# Altium PCB PCB1.PcbDoc
Units mm, origin at the board's own origin, x right, y up, seen from the top; angles counter-clockwise.
Board outline 152.4 x 101.6 mm, 4 copper layers (Top Layer, Layer 1, Layer 2, Bottom Layer), stack 0.603 mm thick; 62 components, 20 nets, 124 pads, 28 vias.
Unrouted connection lines stored in the file: 12.
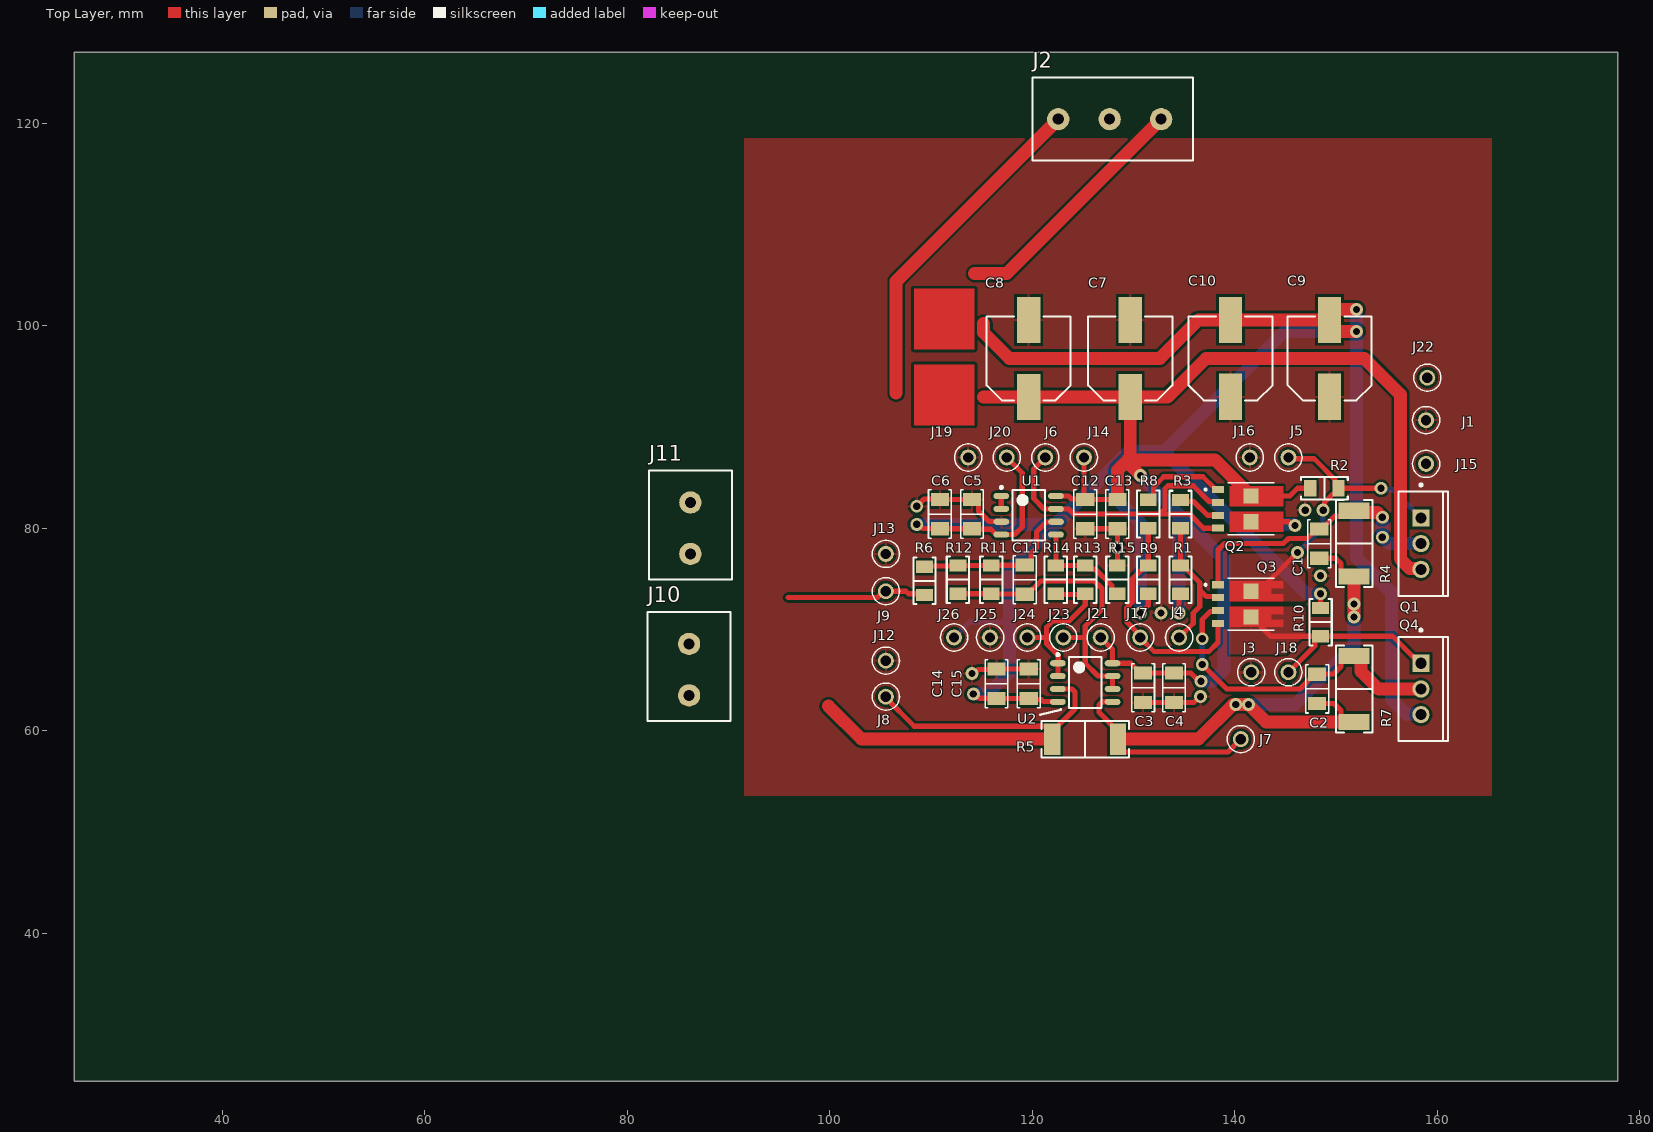
[diagram p0: Top Layer view]
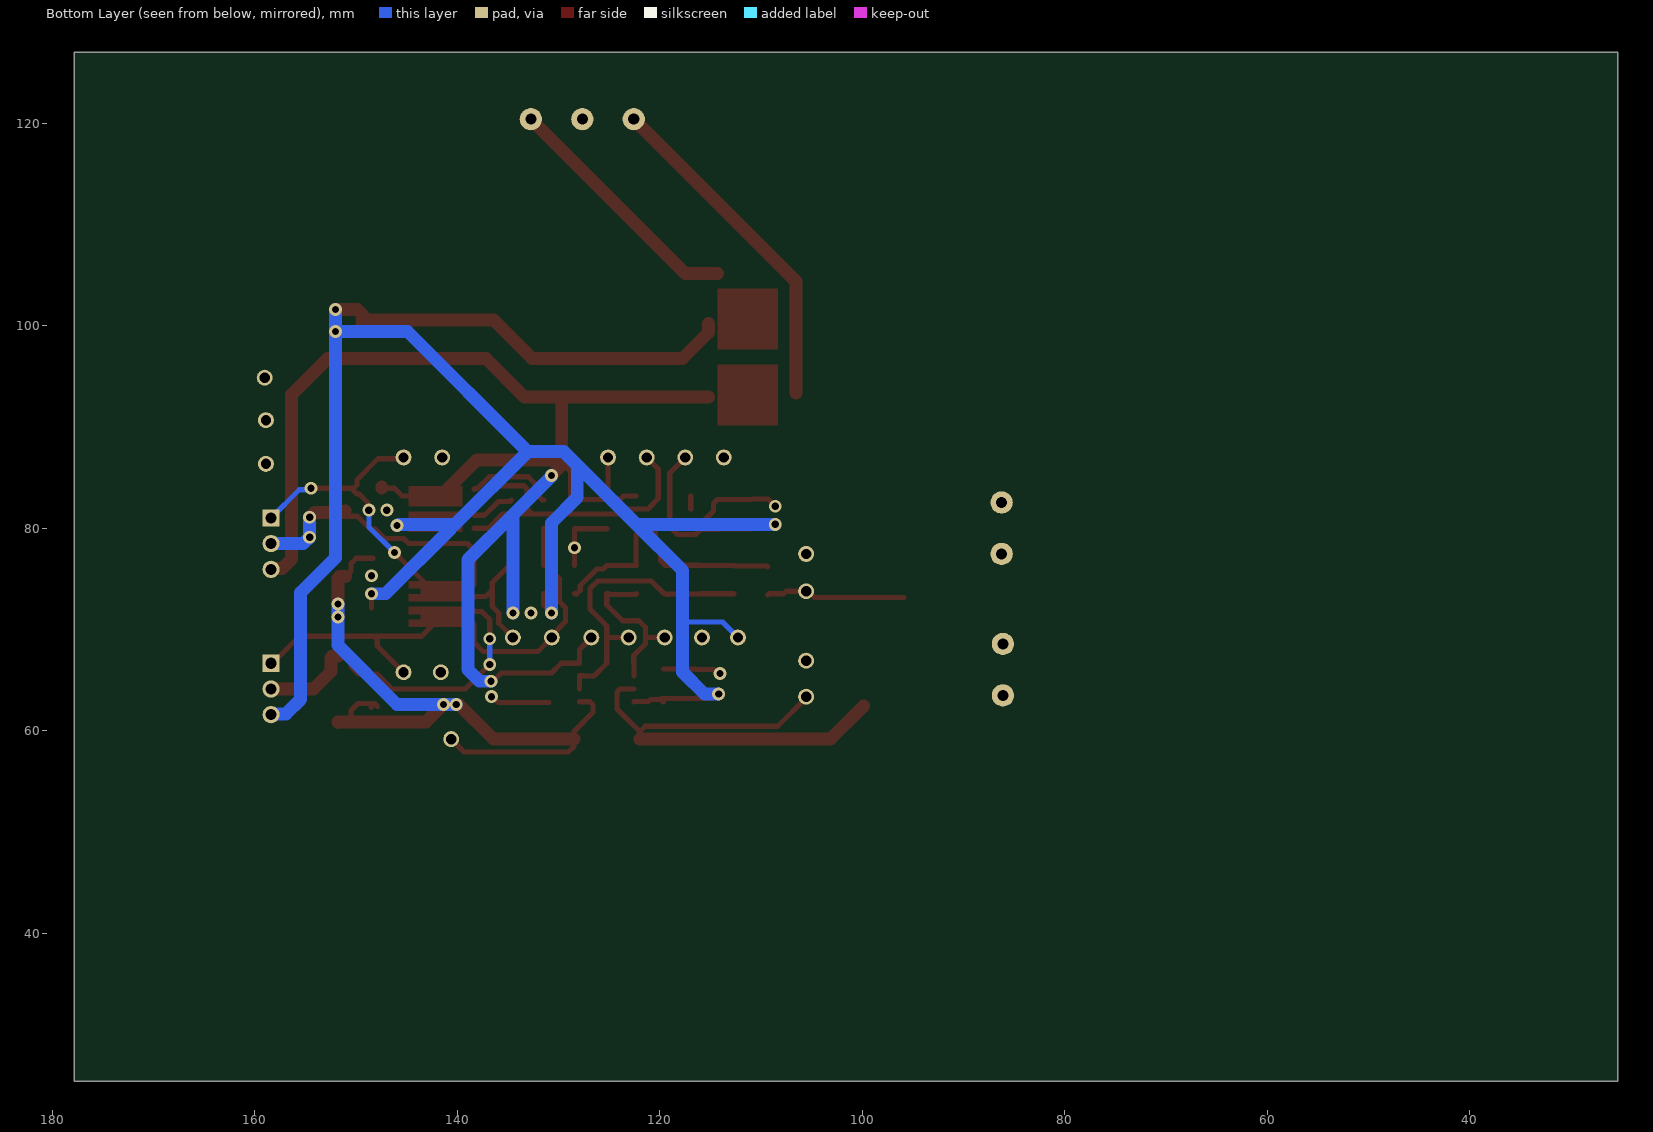
[diagram p1: Bottom Layer view, seen from below]
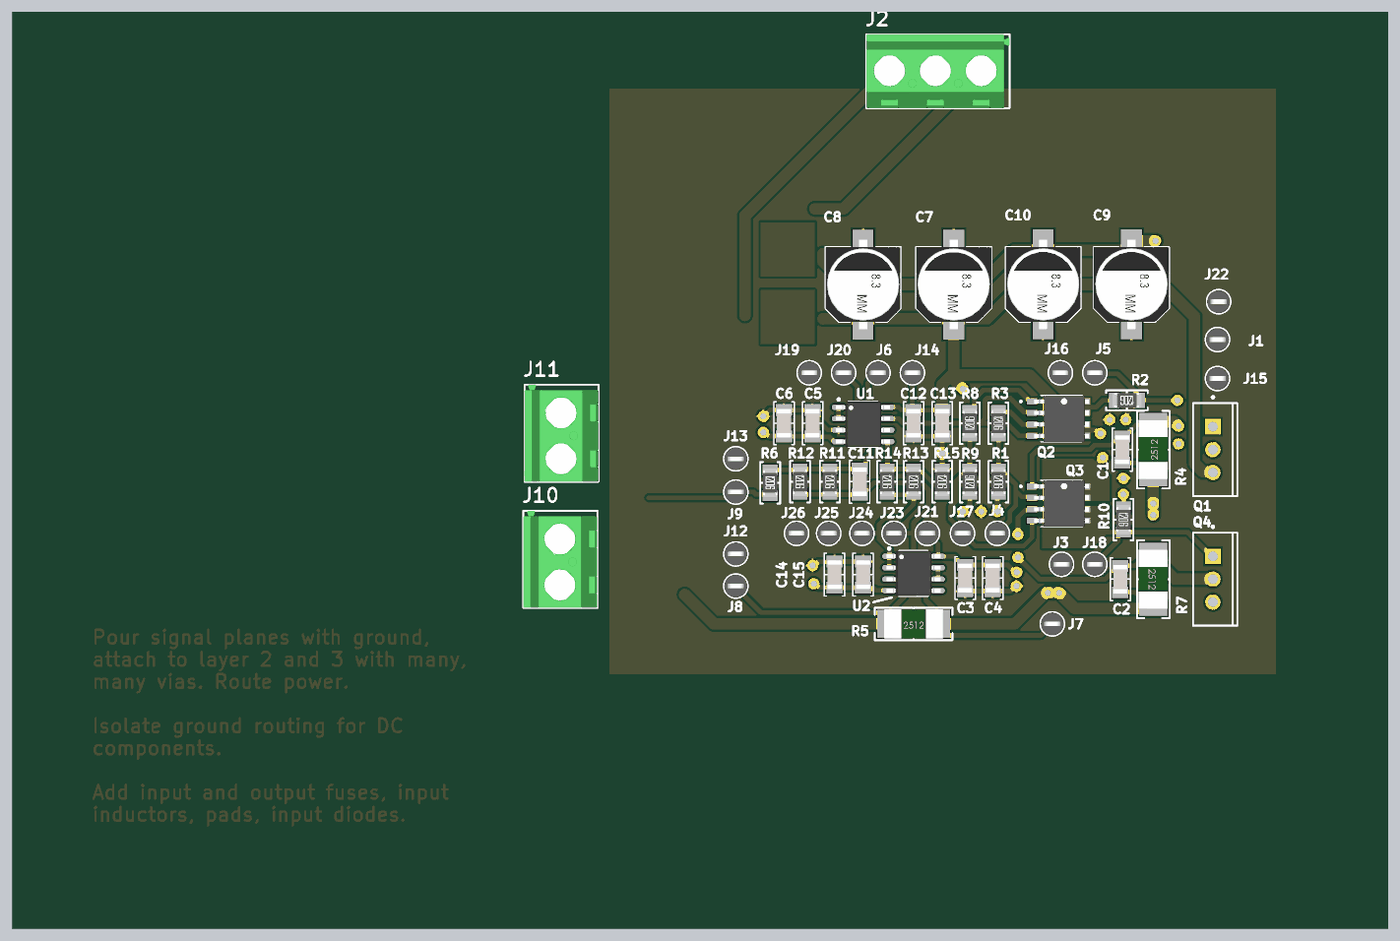
[diagram p2: 3D render of the assembled board from above, using the file's embedded part models]

## Layer stack, top to bottom
Top Solder: solder mask 0.0102, Solder Resist, Dk 3.5
Top Layer: signal copper 0.0356
Dielectric 2: prepreg 0.0711, PP-006, Dk 4.1
Layer 1: signal copper 0.035
Dielectric 1: dielectric 0.32, FR-4, Dk 4.8
Layer 2: signal copper 0.035
Dielectric 3: prepreg 0.0711, PP-006, Dk 4.1
Bottom Layer: signal copper 0.0356
Bottom Solder: solder mask 0.0102, Solder Resist, Dk 3.5

## Board outline
25.4,25.4 177.8,25.4 177.8,127 25.4,127

## Design rules (kind name [scope] priority, off if disabled: settings)
Clearance [All] p1: gap=0.254 ignorepadtopadclearanceinfootprint=FALSE except(0: Arc-Hole Track-Hole SMDPad-Hole THPad-Hole Via-Hole Fill-Hole Poly-Hole Region-Hole Text-Hole)
PolygonConnect [All] p1: connectstyle=Relief reliefconductorwidth=0.254 reliefentries=4 polygonreliefangle="90 Angle" airgapwidth=0.254
RoutingVias [All] p1: holewidth=0.711 width=1.27 viastyle="Through Hole" minholewidth=0.711 minwidth=1.27 maxholewidth=0.711 maxwidth=1.27
SolderMaskExpansion [All] p1: expansion=0.102 istentingtop=FALSE
Width [All] p1: maxlimit=1.27 minlimit=0.254 preferedwidth=0.508 midlayer1_maxwidth=0.254 midlayer1_prefwidth=0.254 midlayer2_maxwidth=0.254 midlayer2_prefwidth=0.254 minimp=50.000000 maximp=50.000000 favimp=50.000000
30 further rules are at their usual default settings.

## Components (designator, comment, footprint, x,y, rotation, side; value= is the part's Value field where it differs from the comment)
C1 "0.1 µF" "CAP 1206_3216 - 0.8MM" 148.336,78.486 r90 top
C2 "0.1 µF" "CAP 1206_3216 - 0.8MM" 148.119,64.135 r270 top
C3 "1 µF" "CAP 1206_3216 - 0.8MM" 130.937,64.262 r90 top
C4 "0.1 µF" "CAP 1206_3216 - 0.8MM" 133.985,64.262 r90 top
C5 "0.1 µF" "CAP 1206_3216 - 0.8MM" 114.046,81.407 r90 top
C6 "1 µF" "CAP 1206_3216 - 0.8MM" 110.871,81.407 r90 top
C7 "100 µF" "CAP ALSMD 8.3MM H10.5MM" 129.667,96.774 r90 top
C8 "100 µF" "CAP ALSMD 8.3MM H10.5MM" 119.634,96.774 r90 top
C9 "100 µF" "CAP ALSMD 8.3MM H10.5MM" 149.352,96.784 r90 top
C10 "100 µF" "CAP ALSMD 8.3MM H10.5MM" 139.573,96.784 r90 top
C11 "47pF" "CAP 1206_3216 - 1.8MM" 119.253,74.93 r270 top
C12 "1 µF" "CAP 1206_3216 - 0.8MM" 125.222,81.407 r90 top
C13 "0.1 µF" "CAP 1206_3216 - 0.8MM" 128.397,81.407 r90 top
C14 "0.1 µF" "CAP 1206_3216 - 0.8MM" 116.459,64.643 r90 top
C15 "1 µF" "CAP 1206_3216 - 0.8MM" 119.634,64.643 r90 top
J1 "5001" FP-5001-MFG 158.877,90.678 r0 top
J2 "282837-3" "TE 282837-3" 127.635,120.396 r0 top
J3 "5001" FP-5001-MFG 141.605,65.786 r0 top
J4 "5001" FP-5001-MFG 134.493,69.215 r0 top
J5 "5001" FP-5001-MFG 145.288,86.995 r0 top
J6 "5001" FP-5001-MFG 121.285,86.995 r0 top
J7 "5001" FP-5001-MFG 140.589,59.182 r0 top
J8 "5001" FP-5001-MFG 105.537,63.373 r0 top
J9 "5001" FP-5001-MFG 105.537,73.787 r0 top
J10 "282837-2" "TE 282837-2" 86.106,66.04 r90 top
J11 "282837-2" "TE 282837-2" 86.233,80.01 r90 top
J12 "5001" FP-5001-MFG 105.537,66.929 r0 top
J13 "5001" FP-5001-MFG 105.537,77.47 r0 top
J14 "5001" FP-5001-MFG 125.095,86.995 r0 top
J15 "5001" FP-5001-MFG 158.877,86.36 r0 top
J16 "5001" FP-5001-MFG 141.478,86.995 r0 top
J17 "5001" FP-5001-MFG 130.644,69.215 r0 top
J18 "5001" FP-5001-MFG 145.288,65.786 r0 top
J19 "5001" FP-5001-MFG 113.665,86.995 r0 top
J20 "5001" FP-5001-MFG 117.475,86.995 r0 top
J21 "5001" FP-5001-MFG 126.746,69.215 r0 top
J22 "5001" FP-5001-MFG 159.004,94.869 r0 top
J23 "5001" FP-5001-MFG 123.063,69.215 r0 top
J24 "5001" FP-5001-MFG 119.507,69.215 r0 top
J25 "5001" FP-5001-MFG 115.824,69.215 r0 top
J26 "5001" FP-5001-MFG 112.268,69.215 r0 top
Q1 "TIP32C" ONSC-TO-220-3-221A-09 158.369,78.486 r0 top
Q2 "PHPT610030NPK" TRANS_BUK9K18-40E,115 141.605,81.915 r0 top
Q3 "PHPT610030NPK" TRANS_BUK9K18-40E,115 141.605,72.517 r0 top
Q4 "TIP31C" ONSC-TO-220-3-221A-09 158.369,64.135 r0 top
R1 "2.2 kOhms" "RES 1206_3216" 134.62,74.93 r270 top
R2 "51 Ohms" "RES 1206_3216" 148.844,83.947 r180 top
R3 "5.1 Ohms" "RES 1206_3216" 134.62,81.407 r270 top
R4 "330 mOhms" "STACKPOLE CSR2512" 151.765,78.486 r90 top
R5 "500 mOhms" "STACKPOLE CSR2512" 125.222,59.182 r0 top
R6 "6.2 kOhms" "RES 1206_3216" 109.347,74.803 r270 top
R7 "330 mOhms" "STACKPOLE CSR2512" 151.765,64.135 r270 top
R8 "5.1 Ohms" "RES 1206_3216" 131.445,81.41 r90 top
R9 "2.2 kOhms" "RES 1206_3216" 131.445,74.93 r90 top
R10 "51 Ohms" "RES 1206_3216" 148.463,70.739 r270 top
R11 "1 kOhms" "RES 1206_3216" 115.951,74.93 r270 top
R12 "1 kOhms" "RES 1206_3216" 112.649,74.93 r270 top
R13 "1 kOhms" "RES 1206_3216" 125.222,74.93 r270 top
R14 "1 kOhms" "RES 1206_3216" 122.301,74.93 r270 top
R15 "6.2 kOhms" "RES 1206_3216" 128.397,74.93 r270 top
U1 "TLV9362" SOIC8-127P600X175-8N 119.634,81.28 r0 top
U2 "TLV9362" SOIC8-127P600X175-8N 125.222,64.77 r0 top

## Footprints (in the part's own frame and the unit in brackets; to place one, negate y for a bottom-side part, rotate by r counter-clockwise, add the part's x,y. Pads: shape width x height; smd on the part's side, far side on the other; paste and mask are expansions set on the pad)
"CAP 1206_3216 - 0.8MM" [mm] "Chip Capacitor, 2-Leads, Body 3.25x1.60mm, IPC Medium Density"
  rect 1.3x1.8 smd: 1(-1.45,0) 2(1.45,0)
  silkscreen extent -2.38,-1.13 2.38,1.13, body extent -1.6,-0.8 1.6,0.8, height 0.8
"CAP 1206_3216 - 1.8MM" [mm] "Chip Capacitor, 2-Leads, Body 3.25x1.60mm, IPC Medium Density"
  rect 1.3x1.8 smd: 1(-1.45,0) 2(1.45,0)
  silkscreen extent -2.38,-1.13 2.38,1.13, body extent -1.6,-0.8 1.6,0.8, height 1.8
"CAP ALSMD 8.3MM H10.5MM" [mm] "Aluminum Electrolytic Capacitor, Body 8.30x8.30x10.50mm, IPC Low Density"
  rect 4.55x2.3 smd: 1(-3.8,0) 2(3.8,0)
  silkscreen extent -4.15,-4.15 4.15,4.15, body extent -4.95,-4.15 4.95,4.15, height 10.5
FP-5001-MFG [mm]
  round 1.57 hole 1.016 paste-2539.97 mask+0: 1(0,0)
  silkscreen extent -1.35,-1.34 1.35,1.34, body extent -1.45,-1.45 1.45,1.45, height 0.25
ONSC-TO-220-3-221A-09 [mm] "FM, 3-Leads, Body 10.3x4.85mm, Pitch 2.54mm"
  rect 1.7x1.7 hole 1.1: 1(0,2.54)
  round 1.7 hole 1.1: 2(0,0) 3(0,-2.54)
  silkscreen extent -2.2,-5.15 2.69,5.92, body extent -2.18,-5.15 2.67,5.15, height 19.85
"RES 1206_3216" [mm] "Chip Resistor, 2-Leads, Body 3.13x1.55mm, IPC Medium Density"
  rect 1.2x1.65 smd: 1(-1.4,0) 2(1.4,0)
  silkscreen extent -2.3,-1.1 2.3,1.1, body extent -1.6,-0.8 1.6,0.8, height 0.6
SOIC8-127P600X175-8N [mm] "SOIC, 8-Leads, Body 4.91x3.90mm, Pitch 1.27mm, IPC Medium Density"
  oval 1.55x0.6 smd: 1(-2.7,1.905) 2(-2.7,0.635) 3(-2.7,-0.635) 4(-2.7,-1.905) 5(2.7,-1.905) 6(2.7,-0.635) 7(2.7,0.635) 8(2.7,1.905)
  silkscreen extent -2.82,-2.5 1.6,2.88, body extent -3,-2.5 3,2.5, height 1.75
"STACKPOLE CSR2512" [mm] "Chip Resistor, 2-Leads, Body 6.40x3.20mm, IPC Medium Density"
  rect 1.6x3.1 smd: 1(-3.25,0) 2(3.25,0)
  silkscreen extent -4.3,-1.8 4.3,1.8, body extent -3.27,-1.6 3.28,1.6, height 0.5
"TE 282837-2" [mm] "Wire to Board Terminal Block Horizontal with Board, 2 Postions, Body 10.76x8.2 mm, Pitch 5.08mm"
  round 2.2 hole 1.1: 1(-2.54,0) 2(2.54,0)
  silkscreen extent -5.08,-4.1 5.68,4.1, body extent -5.08,-4.1 5.68,4.1, height 10.3
"TE 282837-3" [mm] "Wire to Board Terminal Block Horizontal with Board, 3 Postions, Body 15.84x8.2mm, Pitch 5.08mm"
  round 2.2 hole 1.1: 1(-5.08,0) 2(0,0) 3(5.08,0)
  silkscreen extent -7.62,-4.1 8.22,4.1, body extent -7.62,-4.1 8.22,4.1, height 10.3
TRANS_BUK9K18-40E,115 [mm]
  rect 1.15x0.7 smd paste-0.025: 1(-3.275,1.905) 2(-3.275,0.635) 3(-3.275,-0.635) 4(-3.275,-1.905)
  rect 1.5x1.5 smd paste-2 mask+0: 5_6(0,-1.27) 7_8(0,1.27)
  Top Layer region: 3.175,-0.985 2,-0.985 2,-1.555 3.175,-1.555 3.175,-2.255 -2.1,-2.255 -2.1,-0.285 3.175,-0.285
  Top Layer region: 3.175,1.555 2,1.555 2,0.985 3.175,0.985 3.175,0.285 -2.1,0.285 -2.1,2.255 3.175,2.255
  silkscreen extent -4.6,-2.57 2.29,2.57, body extent -3.03,-2.56 3.03,2.56, height 1.05

## Part data
C1 C2 C4 C5 C13 C14: library part 885012208087, "CAP CER 0.1UF 50V X7R 1206", Device Package="1206 (3216 Metric)", manufacturer="Würth Elektronik", Operating Temperature="-55°C ~ 125°C", Supplier Part Number 1=732-8127-1-ND, Temperature Coefficient=X7R, Tolerance=±10%, Voltage - Rated=50V, Applications="General Purpose", Capacitance="0.1 µF", componentlink1description=Datasheet, componentlink1url=https://katalog.we-online.de/pbs/datasheet/885012208087.pdf, componentlink2description="DigiKey Link", componentlink2url=https://www.digikey.com/en/products/detail/würth-elektronik/885012208087/5453982, lastupdated="6/4/2024 7:10:27 PM", Lifecycle Status=Active, Minimum Order=1, Mounting Type="Surface Mount, MLCC", Package / Case="1206 (3216 Metric)", packaging=TapeAndReel, Part Number=885012208087, Part Status=Active, partid=20879, price=0.06, series=WCAP-CSGP, Size / Dimension="0.126\" L x 0.063\" W (3.20mm x 1.60mm)", Supplier 1=DigiKey, Thickness (Max)="0.035\" (0.90mm)"
C3 C6 C12 C15: library part 885012208093, "CAP CER 1UF 50V X7R 1206", Device Package="1206 (3216 Metric)", manufacturer="Würth Elektronik", Operating Temperature="-55°C ~ 125°C", Supplier Part Number 1=732-7577-1-ND, Temperature Coefficient=X7R, Tolerance=±10%, Voltage - Rated=50V, Applications="General Purpose", Capacitance="1 µF", componentlink1description=Datasheet, componentlink1url=https://katalog.we-online.de/pbs/datasheet/885012208093.pdf, componentlink2description="DigiKey Link", componentlink2url=https://www.digikey.com/en/products/detail/würth-elektronik/885012208093/5453432, lastupdated="6/4/2024 7:10:33 PM", Lifecycle Status=Active, Minimum Order=1, Mounting Type="Surface Mount, MLCC", Package / Case="1206 (3216 Metric)", packaging=TapeAndReel, Part Number=885012208093, Part Status=Active, partid=39665, price=0.10, series=WCAP-CSGP, Size / Dimension="0.126\" L x 0.063\" W (3.20mm x 1.60mm)", Supplier 1=DigiKey, Thickness (Max)="0.075\" (1.90mm)"
C7 C8 C9 C10: library part 50TZV100M8X10.5, "CAP ALUM 100UF 20% 50V SMD", Device Package="Radial, Can - SMD", Lifetime @ Temp.="2000 Hrs @ 105°C", manufacturer=Rubycon, Operating Temperature="-55°C ~ 105°C", Ratings=AEC-Q200, Ripple Current @ High Frequency="350 mA @ 100 kHz", Ripple Current @ Low Frequency="175 mA @ 120 Hz", Supplier Part Number 1=1189-1651-1-ND, Tolerance=±20%, Voltage - Rated="50 V", Applications=Automotive, Capacitance="100 µF", componentlink1description=Datasheet, componentlink1url=http://www.rubycon.co.jp/en/catalog/e_pdfs/aluminum/e_tzv.pdf, componentlink2description="DigiKey Link", componentlink2url=https://www.digikey.com/en/products/detail/rubycon/50TZV100M8X10-5/3134931, Height - Seated (Max)="0.413\" (10.50mm)", Impedance="340 mOhms", lastupdated="6/3/2024 8:15:48 PM", Lifecycle Status=Active, Minimum Order=1, Mounting Type="Surface Mount", Package / Case="Radial, Can - SMD", packaging=TapeAndReel, Part Number=50TZV100M8X10.5, Part Status=Active, partid=7533, Polarization=Polar, price=0.16, series=TZV, Size / Dimension="0.315\" Dia (8.00mm)", Supplier 1=DigiKey, Surface Mount Land Size="0.327\" L x 0.327\" W (8.30mm x 8.30mm)"
C11: library part 1206AA470KAT1A, "CAP CER 47PF 1KV C0G/NP0 1206", Device Package="1206 (3216 Metric)", manufacturer="AVX Corporation", Operating Temperature="-55°C ~ 125°C", Supplier Part Number 1=478-2949-1-ND, Temperature Coefficient="C0G, NP0", Tolerance=±10%, Voltage - Rated="1000V (1kV)", Applications="General Purpose", Capacitance=47pF, componentlink1description=Datasheet, componentlink1url=http://datasheets.avx.com/AVX-HV_MLCC.pdf, componentlink2description="DigiKey Link", componentlink2url=http://digikey.com/product-detail/en/avx-corporation/1206AA470KAT1A/478-2949-1-ND/808148, Features="High Voltage", lastupdated="9/2/2020 1:05:31 AM", Lifecycle Status=Active, Minimum Order=1, Mounting Type="Surface Mount, MLCC", Package / Case="1206 (3216 Metric)", packaging=TapeAndReel, Part Number=1206AA470KAT1A, Part Status=Active, partid=21825, price=0.11, series=-, Size / Dimension="0.130\" L x 0.063\" W (3.30mm x 1.60mm)", Supplier 1=DigiKey, Thickness (Max)="0.071\" (1.80mm)"
J1 J3 J4 J5 J6 J7 J8 J9 J12 J13 J14 J15 J16 J17 J18 J19 J20 J21 J22 J23 J24 J25 J26: library part CMP-2000-05181-2, "PC TEST POINT MINIATURE BLACK", Color=Black, Flammability Rating="UL94 V-0", Package Quantity=100, Body Material=Bronze, Contact Material=Bronze, Contact Plating=Silver, Diameter=2.54mm, Height=0.3inch, Hole Diameter=1.6mm, Housing Color=Black, Inside Diameter=1.27mm, Insulation=Insulated, Insulation Material=Nylon, Lead Free="Lead Free", Length=7.62mm, Material=Nylon, Mount="Through Hole", Number of Contacts=1, Number of Ports=1, Orientation=Straight, Outside Diameter=2.54mm, packaging=Bulk, Plating=Silver, REACH SVHC="No SVHC", RoHS Compliant=Yes, series=THM, Termination="Through Hole"
J2: "TERM BLK 3P SIDE ENT 5.08MM PCB", Color=Green, Current="13.5 A", manufacturer="TE Connectivity AMP Connectors", Supplier Part Number 1=A113321-ND, Voltage="300 V", componentlink1description=Datasheet, componentlink1url=https://www.te.com/commerce/DocumentDelivery/DDEController?Action=srchrtrv&DocNm=282837&DocType=Customer+Drawing&DocLang=English, componentlink2description="DigiKey Link", componentlink2url=https://www.digikey.com/en/products/detail/te-connectivity-amp-connectors/282837-3/2187974, Features="Interlocking (Side)", lastupdated="6/21/2022 3:00:39 PM", Lifecycle Status=Active, Mating Orientation="Horizontal with Board", Minimum Order=1, Mounting Type="Through Hole", Number of Levels=1, packaging=Tray, Part Number=282837-3, Part Status=Active, Pitch="0.200\" (5.08mm)", Positions Per Level=3, price=0.47, series=Buchanan, Supplier 1=DigiKey, Wire Gauge="16-28 AWG", Wire Termination="Screw - Rising Cage Clamp"
J10 J11: "TERM BLK 2P SIDE ENT 5.08MM PCB", Color=Green, Current="13.5 A", manufacturer="TE Connectivity AMP Connectors", Supplier Part Number 1=A113320-ND, Voltage="300 V", componentlink1description=Datasheet, componentlink1url=https://www.te.com/commerce/DocumentDelivery/DDEController?Action=srchrtrv&DocNm=282837&DocType=Customer+Drawing&DocLang=English, componentlink2description="DigiKey Link", componentlink2url=https://www.digikey.com/en/products/detail/te-connectivity-amp-connectors/282837-2/2187973, Features="Interlocking (Side)", lastupdated="6/21/2022 3:00:23 PM", Lifecycle Status=Active, Mating Orientation="Horizontal with Board", Minimum Order=1, Mounting Type="Through Hole", Number of Levels=1, packaging=Tray, Part Number=282837-2, Part Status=Active, Pitch="0.200\" (5.08mm)", Positions Per Level=2, price=0.31, series=Buchanan, Supplier 1=DigiKey, Wire Gauge="16-28 AWG", Wire Termination="Screw - Rising Cage Clamp"
Q1: "Complementary Silicon Plastic Power Transistor, 3-Pin TO-220, Tube", manufacturer=STMicroelectronics, Supplier Part Number 1=TIP32COS-ND, componentlink1description="Manufacturer URL", componentlink1url=https://www.st.com/content/st_com/en.html, componentlink2description=Datasheet, componentlink2url=https://eu.mouser.com/datasheet/2/389/tip32c-1852151.pdf, ComponentLink3Description="Package Specification", ComponentLink3URL=http://www.onsemi.com/pub_link/Collateral/221A-09.PDF, DatasheetVersion="Rev. 14", fT Min (MHz)=3, IC Continuous (A)=3, Mounting Technology="Through Hole", PackageDescription="3-Pin Flange Mount, Vertical Straight Lead, Body 9.97 x 4.445 mm, Pitch 2.54 mm", PackageReference=TO-220-3-221A-09, PackageVersion="Rev. AG, 09/2011", Packing=Tube, PartNumber=TIP32C, Polarity=PNP, RoHS=FALSE, Supplier 1=Digi-Key
Q4: "Complementary Silicon Plastic Power Transistor, 3-Pin TO-220, Tube", manufacturer=STMicroelectronics, Supplier Part Number 1=TIP31COS-ND, componentlink1description="Manufacturer URL", componentlink1url=https://www.st.com/content/st_com/en.html, componentlink2description=Datasheet, componentlink2url=https://eu.mouser.com/datasheet/2/389/tip31c-1852430.pdf, ComponentLink3Description="Package Specification", ComponentLink3URL=http://www.onsemi.com/pub_link/Collateral/221A-09.PDF, DatasheetVersion="Rev. 14", fT Min (MHz)=3, IC Continuous (A)=3, Mounting Technology="Through Hole", PackageDescription="3-Pin Flange Mount, Vertical Straight Lead, Body 9.97 x 4.445 mm, Pitch 2.54 mm", PackageReference=TO-220-3-221A-09, PackageVersion="Rev. AG, 09/2011", Packing=Tube, PartNumber=TIP31C, Polarity=NPN, RoHS=FALSE, Supplier 1=Digi-Key
R1 R9: library part ERJ-8GEYJ222V, "RES SMD 2.2K OHM 5% 1/4W 1206", Device Package="1206 (3216 Metric)", manufacturer="Panasonic Electronic Components", Operating Temperature="-55°C ~ 155°C", Power (Watts)="0.25W, 1/4W", Ratings=AEC-Q200, Supplier Device Package=1206, Supplier Part Number 1=P2.2KECT-ND, Temperature Coefficient=±200ppm/°C, Tolerance=±5%, componentlink1description=Datasheet, componentlink1url=http://industrial.panasonic.com/www-cgi/jvcr13pz.cgi?E+PZ+3+AOA0001+ERJ8GEYJ222V+7+WW, componentlink2description="DigiKey Link", componentlink2url=https://www.digikey.com/en/products/detail/panasonic-electronic-components/ERJ-8GEYJ222V/10357, Composition="Thick Film", Features="Automotive AEC-Q200", Height - Seated (Max)="0.028\" (0.70mm)", lastupdated="2/9/2024 8:54:10 PM", Lifecycle Status=Active, Minimum Order=1, Number of Terminations=2, Package / Case="1206 (3216 Metric)", packaging=TapeAndReel, Part Number=ERJ-8GEYJ222V, Part Status=Active, partid=35911, price=0.02, Resistance="2.2 kOhms", series=ERJ-8G, Size / Dimension="0.126\" L x 0.063\" W (3.20mm x 1.60mm)", Supplier 1=DigiKey
R2 R10: library part ERJ-8GEYJ510V, "RES SMD 51 OHM 5% 1/4W 1206", Device Package="1206 (3216 Metric)", manufacturer="Panasonic Electronic Components", Operating Temperature="-55°C ~ 155°C", Power (Watts)="0.25W, 1/4W", Ratings=AEC-Q200, Supplier Device Package=1206, Supplier Part Number 1=P51ECT-ND, Temperature Coefficient=±200ppm/°C, Tolerance=±5%, componentlink1description=Datasheet, componentlink1url=http://industrial.panasonic.com/www-cgi/jvcr13pz.cgi?E+PZ+3+AOA0001+ERJ8GEYJ510V+7+WW, componentlink2description="DigiKey Link", componentlink2url=https://www.digikey.com/en/products/detail/panasonic-electronic-components/ERJ-8GEYJ510V/11678, Composition="Thick Film", Features="Automotive AEC-Q200", Height - Seated (Max)="0.028\" (0.70mm)", lastupdated="2/9/2024 8:54:16 PM", Lifecycle Status=Active, Minimum Order=1, Number of Terminations=2, Package / Case="1206 (3216 Metric)", packaging=TapeAndReel, Part Number=ERJ-8GEYJ510V, Part Status=Active, partid=34147, price=0.02, Resistance="51 Ohms", series=ERJ-8G, Size / Dimension="0.126\" L x 0.063\" W (3.20mm x 1.60mm)", Supplier 1=DigiKey
R3 R8: library part ERJ-8GEYJ5R1V, "RES SMD 5.1 OHM 5% 1/4W 1206", Device Package="1206 (3216 Metric)", manufacturer="Panasonic Electronic Components", Operating Temperature="-55°C ~ 155°C", Power (Watts)="0.25W, 1/4W", Ratings=AEC-Q200, Supplier Device Package=1206, Supplier Part Number 1=P5.1ECT-ND, Temperature Coefficient="-100/ +600ppm/°C", Tolerance=±5%, componentlink1description=Datasheet, componentlink1url=http://industrial.panasonic.com/www-cgi/jvcr13pz.cgi?E+PZ+3+AOA0001+ERJ8GEYJ5R1V+7+WW, componentlink2description="DigiKey Link", componentlink2url=https://www.digikey.com/en/products/detail/panasonic-electronic-components/ERJ-8GEYJ5R1V/282211, Composition="Thick Film", Features="Automotive AEC-Q200", Height - Seated (Max)="0.028\" (0.70mm)", lastupdated="2/9/2024 8:54:09 PM", Lifecycle Status=Active, Minimum Order=1, Number of Terminations=2, Package / Case="1206 (3216 Metric)", packaging=TapeAndReel, Part Number=ERJ-8GEYJ5R1V, Part Status=Active, partid=36042, price=0.02, Resistance="5.1 Ohms", series=ERJ-8G, Size / Dimension="0.126\" L x 0.063\" W (3.20mm x 1.60mm)", Supplier 1=DigiKey
R4 R7: library part CSRN2512FKR330, "RES 0.33 OHM 1% 2W 2512", Device Package="2512 (6432 Metric)", manufacturer="Stackpole Electronics Inc", Operating Temperature="-55°C ~ 155°C", Power (Watts)=2W, Supplier Device Package=2512, Supplier Part Number 1=CSRN2512FKR330CT-ND, Temperature Coefficient=±200ppm/°C, Tolerance=±1%, componentlink1description=Datasheet, componentlink1url=https://www.seielect.com/catalog/sei-csr_csrn.pdf, componentlink2description="DigiKey Link", componentlink2url=https://www.digikey.com/en/products/detail/stackpole-electronics-inc/CSRN2512FKR330/1742756, Composition="Thick Film", Features="Current Sense", Height - Seated (Max)="0.028\" (0.70mm)", lastupdated="2/17/2022 6:43:57 PM", Lifecycle Status=Active, Minimum Order=1, Number of Terminations=2, Package / Case="2512 (6432 Metric)", packaging=TapeAndReel, Part Number=CSRN2512FKR330, Part Status=Active, partid=1770, price=0.12, Resistance="330 mOhms", series=CSRN, Size / Dimension="0.250\" L x 0.124\" W (6.35mm x 3.15mm)", Supplier 1=DigiKey
R5: library part CSRN2512FKR500, "RES 0.5 OHM 1% 2W 2512", Device Package="2512 (6432 Metric)", manufacturer="Stackpole Electronics Inc", Operating Temperature="-55°C ~ 155°C", Power (Watts)=2W, Supplier Device Package=2512, Supplier Part Number 1=CSRN2512FKR500CT-ND, Temperature Coefficient=±200ppm/°C, Tolerance=±1%, componentlink1description=Datasheet, componentlink1url=https://www.seielect.com/catalog/sei-csr_csrn.pdf, componentlink2description="DigiKey Link", componentlink2url=https://www.digikey.com/en/products/detail/stackpole-electronics-inc/CSRN2512FKR500/1742768, Composition="Thick Film", Features="Current Sense", Height - Seated (Max)="0.028\" (0.70mm)", lastupdated="2/17/2022 6:43:58 PM", Lifecycle Status=Active, Minimum Order=1, Number of Terminations=2, Package / Case="2512 (6432 Metric)", packaging=TapeAndReel, Part Number=CSRN2512FKR500, Part Status=Active, partid=1683, price=0.07, Resistance="500 mOhms", series=CSRN, Size / Dimension="0.250\" L x 0.124\" W (6.35mm x 3.15mm)", Supplier 1=DigiKey
R6 R15: library part ERA-8AEB622V, "RES SMD 6.2K OHM 0.1% 1/4W 1206", Device Package="1206 (3216 Metric)", manufacturer="Panasonic Electronic Components", Operating Temperature="-55°C ~ 155°C", Power (Watts)="0.25W, 1/4W", Ratings=AEC-Q200, Supplier Device Package=1206, Supplier Part Number 1=10-ERA-8AEB622VCT-ND, Temperature Coefficient=±25ppm/°C, Tolerance=±0.1%, componentlink1description=Datasheet, componentlink1url=https://industrial.panasonic.com/cdbs/www-data/pdf/RDM0000/AOA0000C307.pdf, componentlink2description="DigiKey Link", componentlink2url=https://www.digikey.com/en/products/detail/panasonic-electronic-components/ERA-8AEB622V/3071119, Composition="Thin Film", Features="Automotive AEC-Q200", Height - Seated (Max)="0.028\" (0.70mm)", lastupdated="2/9/2024 8:54:11 PM", Lifecycle Status=Active, Minimum Order=1, Number of Terminations=2, Package / Case="1206 (3216 Metric)", packaging=TapeAndReel, Part Number=ERA-8AEB622V, Part Status=Active, partid=35569, price=0.10, Resistance="6.2 kOhms", series=ERA-8A, Size / Dimension="0.126\" L x 0.063\" W (3.20mm x 1.60mm)", Supplier 1=DigiKey
R11 R12 R13 R14: library part ERA-8AEB102V, "RES SMD 1K OHM 0.1% 1/4W 1206", Device Package="1206 (3216 Metric)", manufacturer="Panasonic Electronic Components", Operating Temperature="-55°C ~ 155°C", Power (Watts)="0.25W, 1/4W", Ratings=AEC-Q200, Supplier Device Package=1206, Supplier Part Number 1=P1.0KBCCT-ND, Temperature Coefficient=±25ppm/°C, Tolerance=±0.1%, componentlink1description=Datasheet, componentlink1url=https://industrial.panasonic.com/cdbs/www-data/pdf/RDM0000/AOA0000C307.pdf, componentlink2description="DigiKey Link", componentlink2url=https://www.digikey.com/en/products/detail/panasonic-electronic-components/ERA-8AEB102V/3070741, Composition="Thin Film", Features="Automotive AEC-Q200", Height - Seated (Max)="0.028\" (0.70mm)", lastupdated="2/9/2024 8:54:17 PM", Lifecycle Status=Active, Minimum Order=1, Number of Terminations=2, Package / Case="1206 (3216 Metric)", packaging=TapeAndReel, Part Number=ERA-8AEB102V, Part Status=Active, partid=33986, price=0.10, Resistance="1 kOhms", series=ERA-8A, Size / Dimension="0.126\" L x 0.063\" W (3.20mm x 1.60mm)", Supplier 1=DigiKey
U1 U2: "TLV936x 10-MHz, 40-V, RRO, Operational Amplifie", componentlink1description=Datasheet, componentlink1url=https://www.ti.com/lit/ds/symlink/tlv9362.pdf
Q2 Q3: componentlink1description=Datasheet, componentlink1url=https://assets.nexperia.com/documents/data-sheet/PHPT610030NPK.pdf, componentlink2description=Supplier, componentlink2url=https://hr.mouser.com/ProductDetail/Nexperia/PHPT610030NPKX?qs=%252BRKXB2WKlSeoXKhT5DAScw%3D%3D

## Via types
v1: diameter 1.27, hole 0.711, Top Layer to Bottom Layer, 28 vias

## Nets (pads, with @x,y where several pads share a name; then routed paths per layer and width w, separated by ;. In a path a pad name is that pad's centre, name@x,y a point inside that pad or via, vN(x,y) a via of type N, cw(c..) or ccw(c..) an arc to the next point about the centre after c; other vN are vias at no path point)
GND: C3.1 C4.1 C5.2 C6.2 C7.2 C8.2 C9.1 C10.1 C12.1 C13.1 C14.2 C15.2 J1.1 J2.2 J3.1 J10.2 J11.2 J12.1 J13.1 J16.1 J19.1 J25.1 R15.1 U1.3 | length 28.8
  Top Layer w0.508: v1(108.585,82.169) 109.31,82.894 110.834,82.894 C6.2 C5.2@114.296,82.857 ; C5.2 C5.2@114.296,82.857 ; v1(114.048,65.657) 114.254,65.657 114.663,66.066 116.433,66.066 C14.2 C15.2 ; U1.3 116.916,80.663 115.728,80.663 114.692,81.699 114.692,82.461 C5.2@114.296,82.857 ; C12.1 C13.1 v1(128.397,78.08) R15.1 ; C3.1 C4.1 135.953,62.812 136.514,63.373 v1(136.617,63.373)
  other v1: 132.715,71.628 148.463,75.311 146.939,81.788
NetC1_1: C1.1 C2.2 J7.1 R4.1 R5.2 R7.2 U2.5 | length 76.3
  Top Layer w0.508: U2.5 126.873,62.865 126.575,62.567 126.575,61.829 128.472,59.932 R5.2 128.472,58.458 129.018,57.912 139.319,57.912 J7.1 ; C2.2@147.844,62.41 C2.2 ; C1.1 149.965,77.036 150.469,76.532 150.469,75.782 R4.1@151.015,75.236 ; C2.2@148.515,62.289 C2.2 ; R7.2@151.015,60.885 150.469,61.431 150.469,61.998 149.781,62.685 C2.2
  Top Layer w1.27: R5.2 136.398,59.182 139.827,62.611 v1(140.081,62.611) v1(141.351,62.611) 143.077,60.885 151.015,60.885 R7.2 R7.2@151.713,60.833 ; R4.1@151.015,75.236 151.6,75.236 151.765,75.071 v1(151.765,71.247)
  Bottom Layer w1.27: v1(140.081,62.611) v1(141.351,62.611) 145.923,62.611 151.765,68.453 v1(151.765,72.517)
NetC1_2: C1.2 Q1.2 Q3.1 R4.2 | length 28.4
  Top Layer w0.508: Q3.1 138.33,77.851 138.965,78.486 144.78,78.486 145.288,78.994 147.144,78.994 148.086,79.936 C1.2 148.586,79.936 149.84,81.19 151.219,81.19 R4.2 R4.2@151.041,81.736
  Top Layer w1.27: R4.2@151.041,81.736 R4.2@151.066,81.71 ; R4.2 151.93,81.571 154.078,81.571 v1(154.559,81.09) ; Q1.2@158.369,78.405 Q1.2
  Bottom Layer w1.27: v1(154.559,81.09) v1(154.559,79.121) 155.194,78.486 Q1.2
NetC2_1: C2.1 Q3.3 Q4.2 R7.1 | length 32.7
  Top Layer w0.508: v1(136.779,66.548) 139.192,64.135 146.42,64.135 147.869,65.585 C2.1 ; v1(136.779,69.088) 136.779,70.993 137.572,71.786 138.234,71.786 Q3.3 ; C2.1@148.119,65.622 149.748,65.622 150.469,66.343 150.469,66.839 151.015,67.385 R7.1
  Top Layer w1.27: R7.1 152.298,67.385 152.463,67.22 152.463,65.85 154.178,64.135 Q4.2
  Bottom Layer w0.508: v1(136.779,66.548) v1(136.779,69.088)
NetC11_1: C11.1 R6.1 R11.1 R12.1 U1.6 | length 16.2
  Top Layer w0.508: R6.1 109.41,76.266 112.585,76.266 R12.1 R11.1 115.976,76.355 119.478,76.355 119.899,76.776 119.899,77.549 120.396,78.046 120.396,79.629 121.382,80.615 121.804,80.615 121.834,80.645 U1.6
NetC11_2: C11.2 J23.1 R11.2 R12.2 U2.6 U2.7 | length 30.7
  Top Layer w0.508: R12.2 R11.2 115.976,73.505 C11.2@119.228,73.505 ; C11.2 C11.2@119.228,73.505 ; J23.1@123.266,69.012 J23.1 123.266,69.215 125.095,69.215 125.222,69.088 ; U2.7@127.417,65.435 127.892,65.435 U2.7 ; U2.6 U2.7 ; C11.2@119.228,73.505 119.528,73.505 120.826,74.803 126.111,74.803 126.873,74.041 126.873,72.009 125.222,70.358 125.222,69.088 ; 125.222,69.088 125.222,66.675 126.492,65.405 127.417,65.405 U2.7
NetJ4_1: J4.1 Q3.2 R1.1 R3.2 | length 14.7
  Top Layer w0.508: J4.1 135.89,70.612 135.89,71.628 136.525,72.263 136.525,73.914 ; R3.2 R1.1 134.845,76.33 136.525,74.65 136.525,73.914 ; Q3.2 138.234,73.248 137.191,73.248 136.525,73.914
NetJ5_1: J5.1 Q1.1 Q3.7_8 R2.1 | length 31.2
  Top Layer w0.508: Q3.7_8 142.082,74.264 143.097,74.264 143.097,74.517 144.925,76.345 v1(146.177,77.597) ; J5.1 145.415,86.868 147.828,86.868 149.898,84.798 149.898,84.293 R2.1 ; v1(148.717,81.788) 148.863,81.934 148.863,82.566 149.673,83.376 149.898,83.376 150.244,83.722 R2.1 ; v1(154.432,83.947) R2.1 ; Q1.1@157.773,81.622 Q1.1
  Bottom Layer w0.508: v1(146.177,77.597) 148.717,80.137 v1(148.717,81.788) ; v1(154.432,83.947) 154.578,83.801 155.594,83.801 Q1.1
NetJ6_1: J6.1 Q2.2 Q2.4 U1.7 | length 32.7
  Top Layer w0.508: J6.1 120.39,86.1 120.142,85.852 120.142,82.931 121.158,81.915 U1.7 123.571,81.915 124.079,81.407 132.588,81.407 ; Q2.4 136.906,80.01 135.509,81.407 132.588,81.407 ; Q2.2 138.234,82.646 137.445,82.646 135.89,84.201 133.394,84.201 133.096,83.903 133.096,81.915 132.588,81.407
NetJ8_1: J8.1 J10.1 R5.1 U2.3 | length 48.8
  Top Layer w0.508: J8.1 105.537,63.246 108.331,60.452 121.426,60.452 R5.1@121.972,59.906 ; R5.1 R5.1@121.972,59.906 ; U2.3 123.908,64.135 124.206,63.837 124.206,62.166 121.972,59.932 R5.1@121.972,59.906
  Top Layer w1.27: 99.869,62.437 103.124,59.182 R5.1
NetJ9_1: J9.1 J11.1 R6.2 | length 13.9
  Top Layer w0.508: 95.894,73.152 104.708,73.152 105.343,73.787 J9.1 ; J9.1@105.537,73.784 107.506,73.784 107.76,73.53 109.22,73.53 R6.2
NetJ17_1: J17.1 Q3.4 R8.1 R9.2 | length 23.2
  Top Layer w0.508: R8.1 131.22,80.01 131.445,79.785 R9.2 131.22,76.33 129.921,75.031 129.921,72.771 129.286,72.136 129.286,70.806 130.644,69.448 J17.1 132.041,67.818 137.414,67.818 138.33,68.734 Q3.4
NetJ18_1: J18.1 Q3.5_6 Q4.1 R10.2 | length 23.4
  Top Layer w0.508: Q3.5_6 143.51,69.342 R10.2@148.209,69.342 ; J18.1 147.892,68.39 147.892,69.025 R10.2@148.209,69.342 ; Q4.1 157.773,67.271 157.646,67.271 155.578,69.339 R10.2 148.466,69.342 R10.2@148.209,69.342
NetJ24_1: J24.1 R13.2 R14.2 U2.1 U2.2 | length 16.1
  Top Layer w0.508: J24.1 121.285,69.215 121.412,69.088 ; R14.2 122.364,73.467 125.02,73.467 125.083,73.53 R13.2 125.222,72.422 123.666,70.866 122.047,70.866 121.412,70.231 121.412,69.088 ; U2.2 U2.1 122.553,66.706 122.553,67.439 121.412,68.58 121.412,69.088
NetQ2_1: Q2.1 R8.2 | length 8.9
  Top Layer w0.508: R8.2 131.607,82.81 131.953,83.156 131.953,84.074 132.969,85.09 136.835,85.09 138.009,83.916 138.234,83.916 Q2.1
NetQ2_3: Q2.3 R3.1 | length 4.3
  Top Layer w0.508: R3.1 134.769,82.658 135.909,82.658 137.287,81.28 Q2.3
NetR13_1: R13.1 R14.1 R15.2 U1.5 | length 10.6
  Top Layer w0.508: U1.5 122.334,76.363 R14.1 R13.1 125.568,75.984 126.2,75.984 127.846,74.338 127.846,73.876 128.192,73.53 R15.2
NetU1_1: U1.1 U1.2 | length 1.3
  Top Layer w0.508: U1.2 U1.1
VCC: C3.2 C4.2 C7.1 C8.1 C12.2 C13.2 J2.1 J14.1 J15.1 J21.1 Q1.3 Q2.7_8 R1.2 R2.2 U1.8 U2.8 | length 189.2
  Top Layer w0.508: U1.8 123.571,83.185 123.858,82.898 125.181,82.898 C12.2 ; J14.1 125.095,82.984 C12.2 ; J21.1 127.922,68.039 127.922,66.717 U2.8@127.965,66.675 ; U2.8 129.724,66.675 130.687,65.712 C3.2 C4.2 135.647,65.712 136.462,64.897 v1(136.652,64.897) ; C13.2 C12.2 ; v1(134.493,71.628) 134.493,73.403 R1.2 ; Q2.7_8 145.415,83.185 146.177,83.947 R2.2
  Top Layer w1.27: 106.553,93.345 106.553,104.394 J2.1 ; 115.189,92.964 115.199,92.974 C8.1 C7.1 ; C13.2 128.397,85.725 129.413,86.741 ; v1(130.683,85.217) 129.413,86.487 129.413,86.741 ; Q2.7_8 138.049,86.741 129.413,86.741 ; R2.2 R2.2@147.444,84.102 ; Q1.3 158.287,76.028 157.271,76.028 156.337,76.962 156.337,93.218 152.781,96.774 137.16,96.774 133.36,92.974 C7.1 ; 129.413,86.741 129.667,86.995 C7.1
  Bottom Layer w1.27: v1(130.683,85.217) 130.683,85.143 134.493,81.333 ; v1(134.493,71.628) 134.493,81.333 ; v1(136.652,64.897) 137.791,64.897 138.938,66.044 138.938,76.888 134.493,81.333
VDD: C5.1 C6.1 C9.2 C10.2 C14.1 C15.1 J2.3 J20.1 J22.1 J26.1 Q2.5_6 Q4.3 R9.1 R10.1 U1.4 U2.4 | length 269
  Top Layer w0.508: v1(108.585,80.391) 108.791,80.391 109.199,79.984 110.845,79.984 C6.1 C5.1 114.102,79.901 115.909,79.901 116.434,79.375 U1.4 118.237,79.375 118.999,80.137 118.999,85.471 J20.1 ; v1(114.173,63.627) 114.379,63.627 114.787,63.22 116.433,63.22 C14.1 C15.1 C15.1@119.884,63.193 ; C15.1@119.627,62.831 119.884,63.088 120.889,63.088 121.094,62.883 122.504,62.883 U2.4 ; v1(130.683,71.628) 131.445,72.39 R9.1 ; Q2.5_6 145.336,80.645 145.717,80.264 v1(145.923,80.264) ; R10.1 v1(148.463,73.533)
  Top Layer w1.27: 114.3,105.156 117.475,105.156 J2.3 ; 115.189,100.203 115.189,99.321 117.736,96.774 132.588,96.774 136.398,100.584 C9.2 ; v1(152.019,99.441) 149.867,99.441 149.352,99.956 C9.2 ; v1(152.019,101.6) 149.867,101.6 149.352,101.085 C9.2
  Bottom Layer w0.508: J26.1 113.792,70.739 117.729,70.739
  Bottom Layer w1.27: v1(108.585,80.391) 122.301,80.391 ; v1(114.173,63.627) 115.57,63.627 117.729,65.786 117.729,70.739 117.729,75.819 122.301,80.391 ; v1(130.683,71.628) 130.683,80.518 128.143,83.058 128.143,86.233 ; 140.589,80.01 147.066,73.533 v1(148.463,73.533) ; v1(145.923,80.264) 145.796,80.391 140.97,80.391 140.208,80.391 133.032,87.566 ; v1(152.019,101.6) v1(152.019,99.441) ; Q4.3 158.287,61.677 156.89,61.677 155.448,63.119 155.448,73.66 152.019,77.089 v1(152.019,99.441) ; 122.301,80.391 128.143,86.233 ; 128.143,86.233 129.476,87.566 133.032,87.566 ; 133.032,87.566 144.907,99.441 v1(152.019,99.441)

## Polygon pours and split planes (outlines as drawn)
GND on Top Layer "GND_L01_P002" (solid, pour order 2): 91.567,118.491 165.354,118.491 165.354,53.594 91.567,53.594
NetJ18_1 on Top Layer "NETJ18_1_L01_P000" (solid, pour order 0): 139.505,72.232 139.446,72.173 139.446,67.564 145.034,67.564 146.939,69.469 146.939,72.263
NetJ5_1 on Top Layer "NETJ5_1_L01_P001" (solid, pour order 1): 139.505,72.802 139.446,72.861 139.446,77.47 145.034,77.47 146.939,75.565 146.939,72.771

## Other copper
Top Layer:
  rectangle: 108.3,97.663 114.3,103.663
  rectangle: 108.3,90.17 114.3,96.17
Multi-Layer:
  text "Pour signal planes with ground, attach to layer 2 and 3 with many, many vias. Route power. /  / Isolate ground routing for DC components. /  / Add input and output fuses, input inductors, pads, input diodes." at 34.163,28.067 h1.52

## Silkscreen, mask and mechanical layers (free items; w line width, h text height)
Top Overlay:
  lines w0.254: 120.777,61.595 122.809,62.103